# Altium PCB Pumpkin Template.PcbDoc
Units mil, origin at the board's own origin, x right, y up, seen from the top; angles counter-clockwise.
Board outline 3775 x 3550 mil, 4 copper layers (TOP Copper, Inner Layer 1, Inner Layer 2, BOT Copper), stack 61.2 mil thick; 5 components, 127 nets, 128 pads, 0 vias.
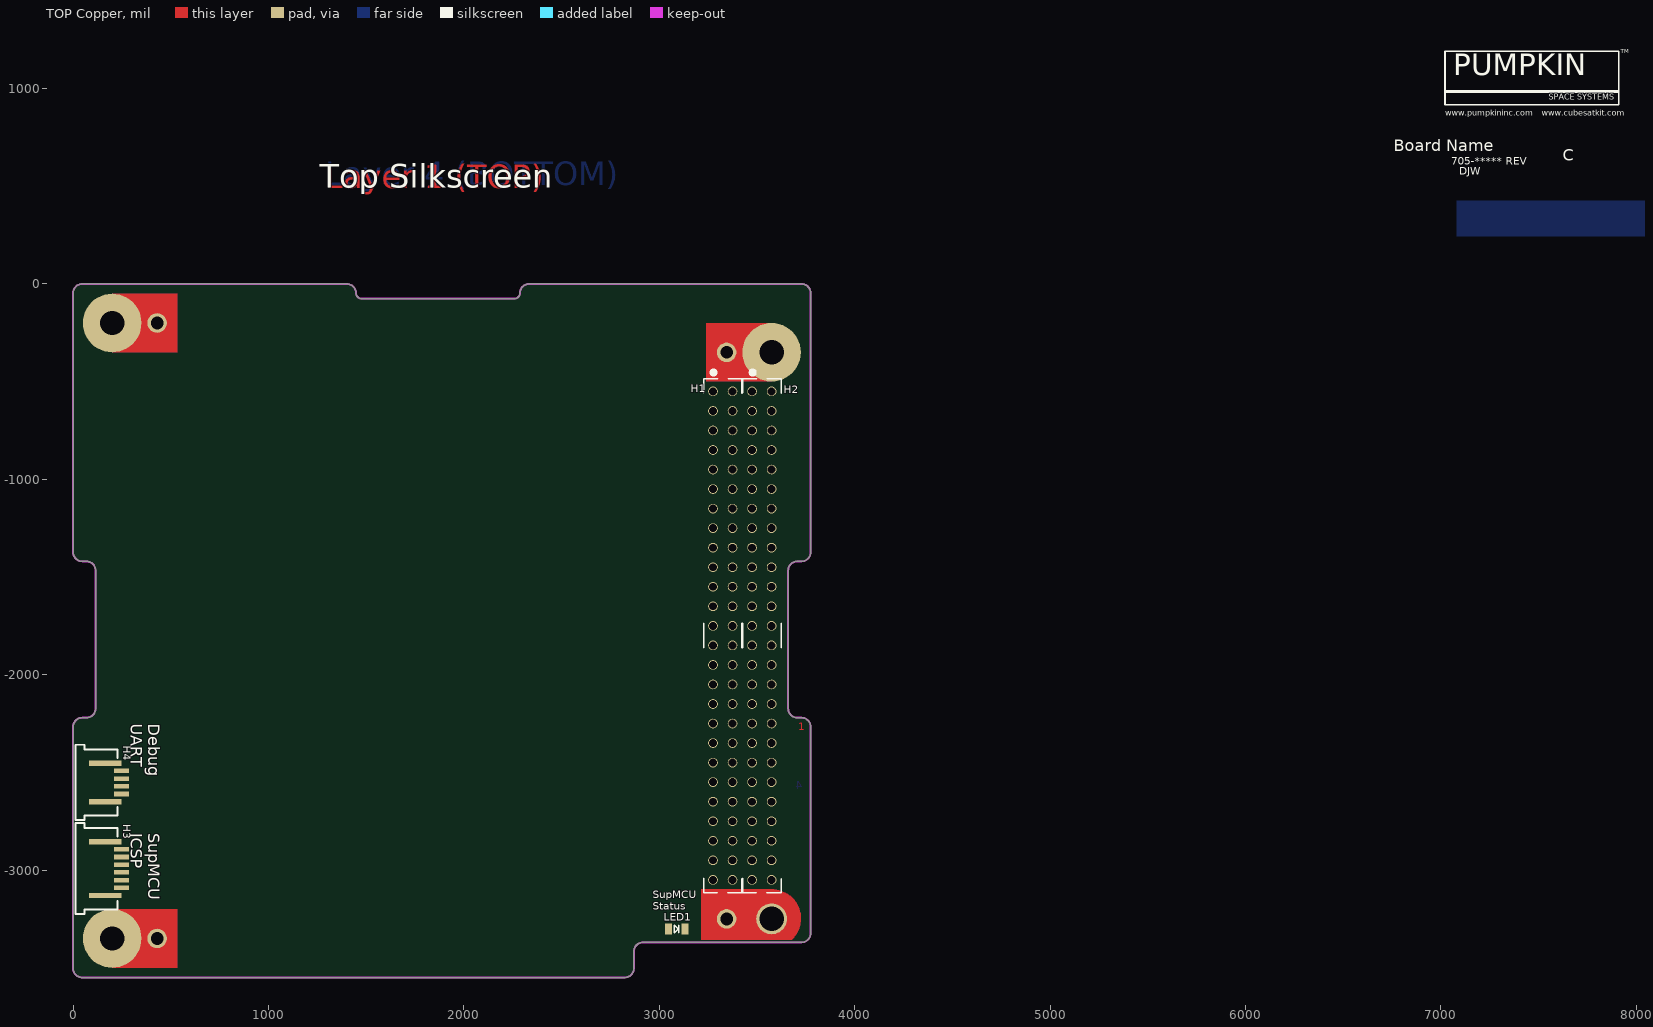
[diagram p0: TOP Copper view]
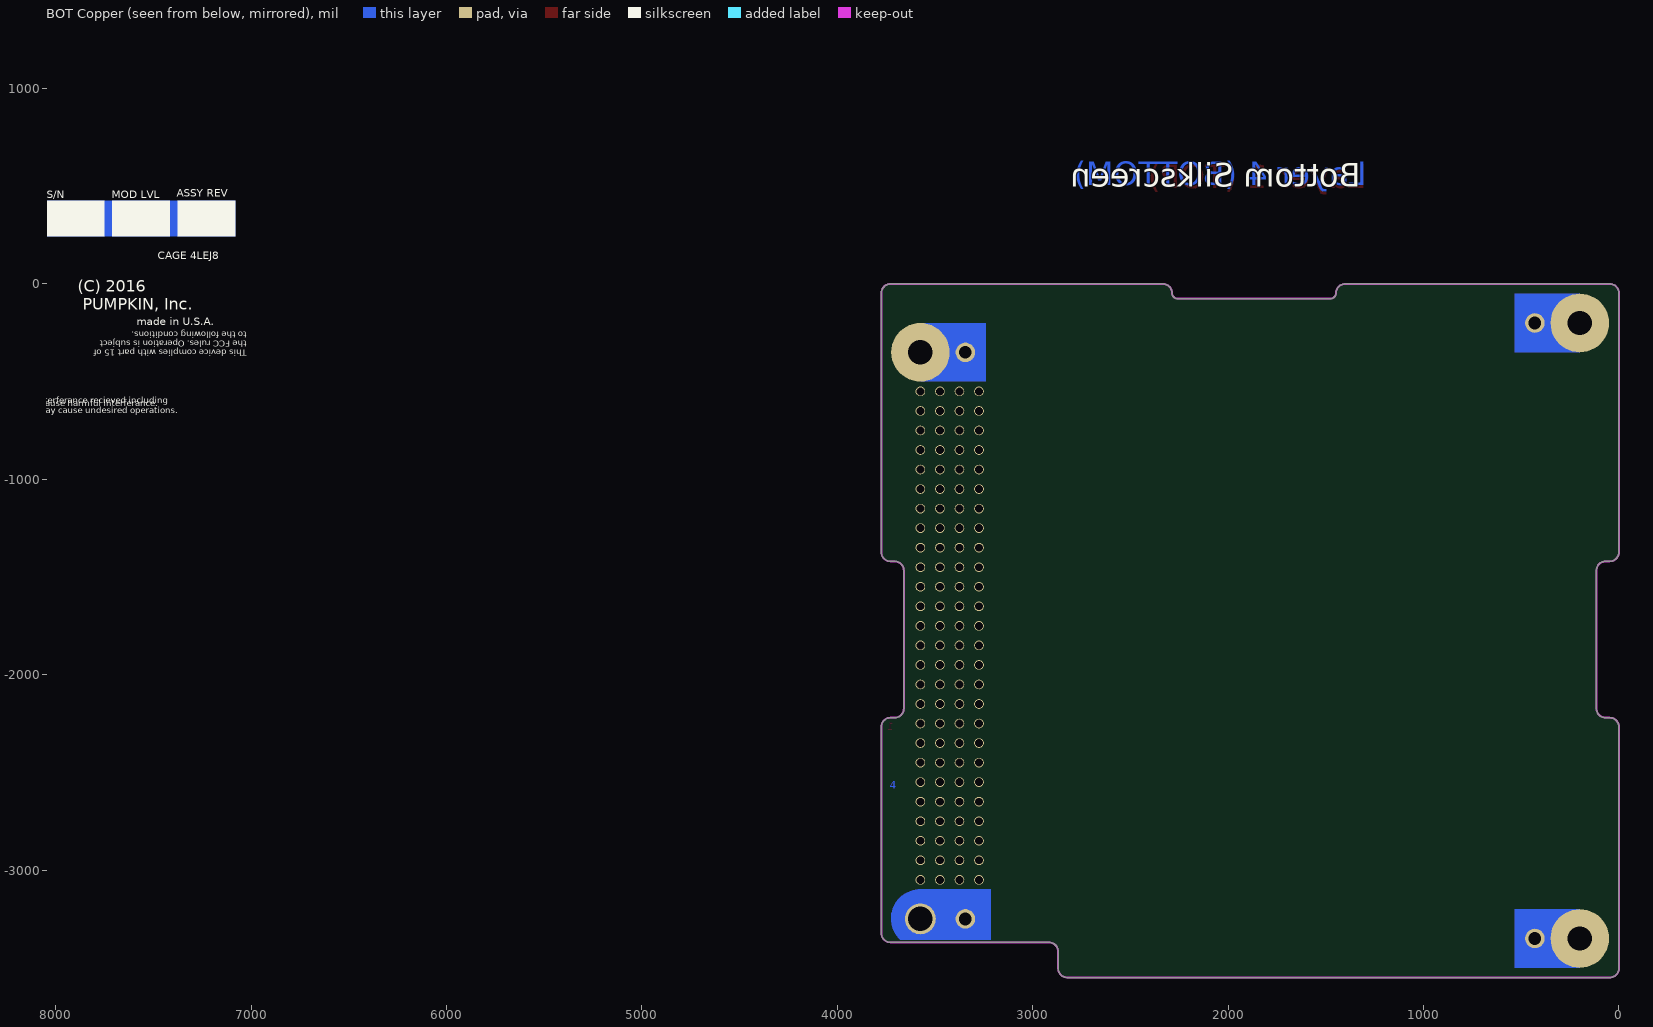
[diagram p1: BOT Copper view, seen from below]
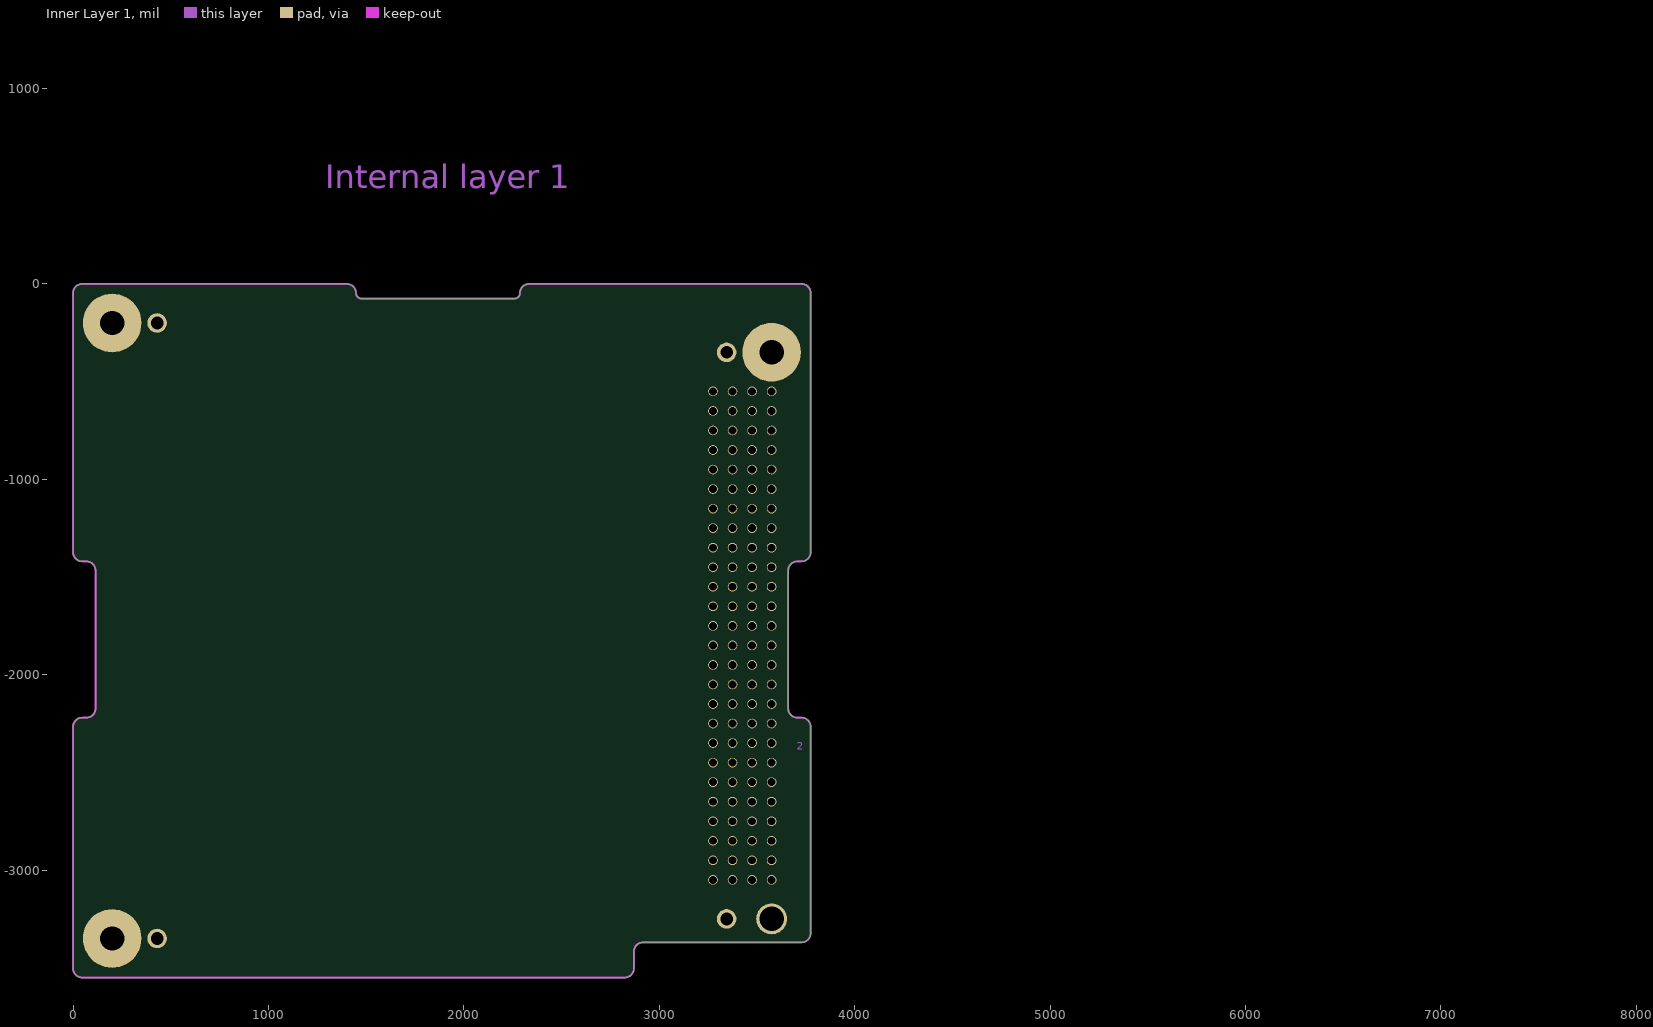
[diagram p2: Inner Layer 1]
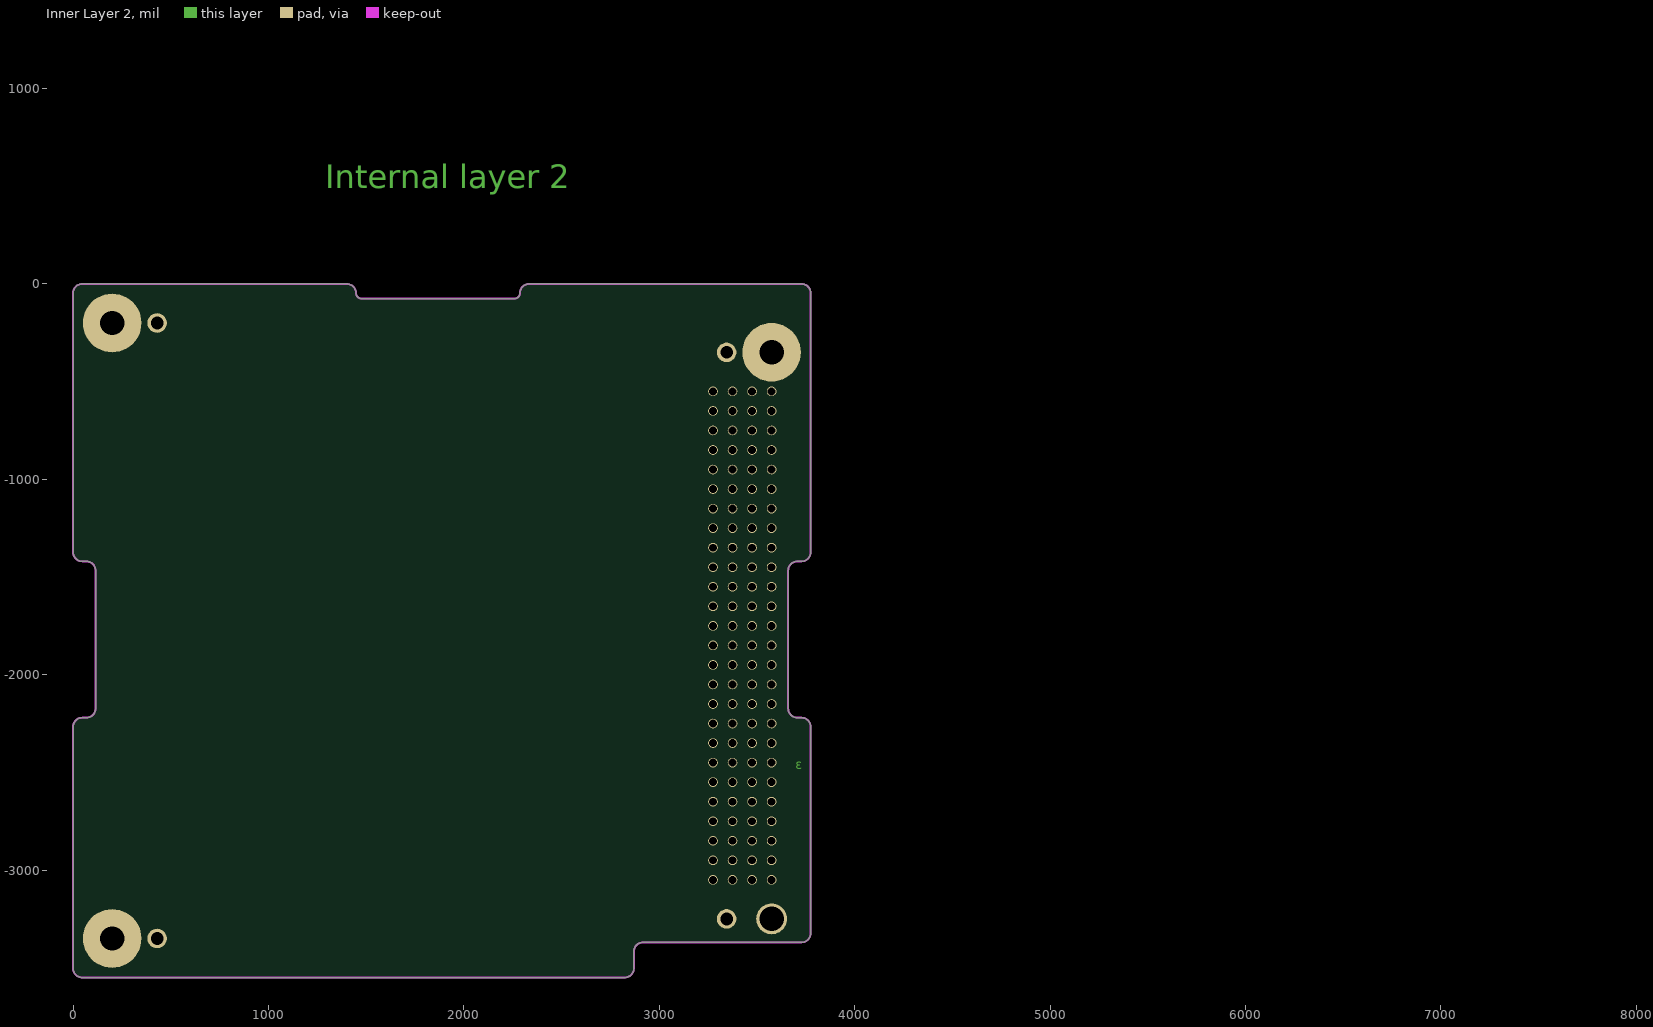
[diagram p3: Inner Layer 2]

## Layer stack, top to bottom
Top Solder: solder mask 0.4, Solder Resist, Dk 3.5
TOP Copper: signal copper 1.4
Dielectric 1: core 8, FR-4, Dk 4.8
Inner Layer 1: signal copper 1.417
Dielectric 3: prepreg 37.566, Dk 4.2
Inner Layer 2: signal copper 1.417
Dielectric 2: core 10, Dk 4.2
BOT Copper: signal copper 1.4
Bottom Solder: solder mask 0.4, Solder Resist, Dk 3.5

## Board outline
0,-3503 0,-2267 cw(c47,-2267) 47,-2220 68,-2220 ccw(c68,-2173) 115,-2173 115,-1467 ccw(c68,-1467) 68,-1420 47,-1420 cw(c47,-1373) 0,-1373 0,-47 cw(c47,-47) 47,0 1401,0 cw(c1401,-47) 1448,-47 ccw(c1476,-47) 1476,-75 2259,-75 ccw(c2259,-47) 2287,-47 cw(c2334,-47) 2334,0 3728,0 cw(c3728,-47) 3775,-47 3775,-1373 cw(c3728,-1373) 3728,-1420 3707,-1420 ccw(c3707,-1467) 3660,-1467 3660,-2173 ccw(c3707,-2173) 3707,-2220 3728,-2220 cw(c3728,-2267) 3775,-2267 3775,-3323 cw(c3728,-3323) 3728,-3370 2917,-3370 ccw(c2917,-3417) 2870,-3417 2870,-3503 cw(c2823,-3503) 2823,-3550 47,-3550 cw(c47,-3503)

## Design rules (kind name [scope] priority, off if disabled: settings)
Clearance Clearance_1 [HasFootprint('Spark_Gap') vs inPolygon] p1: gap=8
Clearance Clearance_3 [HasFootprint('Spark_Gap')] p2: gap=6
Clearance Clearance_2 [InNet('BAT_POS')   and not      HasFootprint('Spark_Gap')] p3: gap=8
Clearance Polygon_Clearence [All vs OnLayer('Keep-Out Layer')] p4: gap=10
Clearance [All] p5: gap=8
ComponentClearance [All] p1: gap=10 collisioncheckmode=3 verticalgap=1.97 showdistances=FALSE
HoleSize [All] p1: absolutevalues=TRUE maxlimit=314.96 minlimit=1 maxpercent=80.000 minpercent=20.000
MinimumSolderMaskSliver [All] p1: minsoldermaskwidth=6
PolygonConnect PolygonConnect_1 [(InPadClass('Power'))or isVia   or HasFootprint('Spark_Gap')] p1: connectstyle=Direct reliefconductorwidth=10 reliefentries=4 polygonreliefangle="90 Angle" airgapwidth=10
PolygonConnect [All] p2: connectstyle=Relief reliefconductorwidth=10 reliefentries=4 polygonreliefangle="90 Angle" airgapwidth=7.09
RoutingVias [All] p1: holewidth=7.87 width=19.68 viastyle="Through Hole" minholewidth=5 minwidth=15.75 maxholewidth=236.22 maxwidth=314.96
SilkToSilkClearance [All] p1: silktosilkclearance=0
SilkToSolderMaskClearance [IsPad] p1: minsilkscreentomaskgap=0 clearancetoexposedcopper=TRUE
SolderMaskExpansion [All] p1: expansion=0
Width [All] p1: maxlimit=100 minlimit=8 preferedwidth=10 minimp=50.000000 maximp=50.000000 favimp=50.000000
25 further rules are at their usual default settings.

## Classes and differential pairs
component class U_Battery_Module_SupMCU: c102 D9 R61
component class "U_Flight Switches": Q1 Q4

## Components (designator, comment, footprint, x,y, rotation, side; value= is the part's Value field where it differs from the comment)
H1 "CubesatBus-H1 no labels" "ESQ-126-37-G-D - bottom" 3325,-1800 r270 top
H2 "CubesatBus-H2 no labels" "ESQ-126-37-G-D - bottom" 3525,-1800 r270 top
H3 "SFW6R-2STE1LF" SFW6R-2STE1LF 247.61,-2992.32 r270 top (schematic designator H6)
H4 "SFW4R-2STE1LF" SFW4R-2STE1LF 247.61,-2551.38 r270 top (schematic designator H5)
LED1 "LED-O-0805" "0805 LED-ORANGE" 3088.83,-3301.97 r180 top

## Footprints (in the part's own frame and the unit in brackets; to place one, negate y for a bottom-side part, rotate by r counter-clockwise, add the part's x,y. Pads: shape width x height; smd on the part's side, far side on the other; paste and mask are expansions set on the pad)
"0805 LED-ORANGE" [mm] "Chip LED, 2-Leads, Body 2.05x1.25mm, IPC Medium Density"
  rect 0.91x1.41 smd: 1(-1.07,0) 2(1.07,0)
  silkscreen extent -0.3,-0.51 0.3,0.5, body extent -1.1,-0.7 1.1,0.7, height 0.8
"ESQ-126-37-G-D - bottom" [mm] "ESQ-126-37-G-D Samtech 52-pin connector"
  round 1.25 hole 1.02: 1(-31.75,-1.27) 2(-31.75,1.27) 3(-29.21,-1.27) 4(-29.21,1.27) 5(-26.67,-1.27) 6(-26.67,1.27) 7(-24.13,-1.27) 8(-24.13,1.27) 9(-21.59,-1.27) 10(-21.59,1.27) 11(-19.05,-1.27) 12(-19.05,1.27) 13(-16.51,-1.27) 14(-16.51,1.27) 15(-13.97,-1.27) 16(-13.97,1.27) 17(-11.43,-1.27) 18(-11.43,1.27) 19(-8.89,-1.27) 20(-8.89,1.27) 21(-6.35,-1.27) 22(-6.35,1.27) 23(-3.81,-1.27) 24(-3.81,1.27) 25(-1.27,-1.27) 26(-1.27,1.27) 27(1.27,-1.27) 28(1.27,1.27) 29(3.81,-1.27) 30(3.81,1.27) 31(6.35,-1.27) 32(6.35,1.27) 33(8.89,-1.27) 34(8.89,1.27) 35(11.43,-1.27) 36(11.43,1.27) 37(13.97,-1.27) 38(13.97,1.27) 39(16.51,-1.27) 40(16.51,1.27) 41(19.05,-1.27) 42(19.05,1.27) 43(21.59,-1.27) 44(21.59,1.27) 45(24.13,-1.27) 46(24.13,1.27) 47(26.67,-1.27) 48(26.67,1.27) 49(29.21,-1.27) 50(29.21,1.27) 51(31.75,-1.27) 52(31.75,1.27)
  silkscreen extent -34.45,-2.5 33.4,2.5, body extent -33.27,-2.49 33.27,2.46, height 2.22
SFW4R-2STE1LF [mm]
  rect 0.6x2 smd mask+0.038: 1(-1.5,0) 2(-0.5,0) 3(0.5,0) 4(1.5,0)
  rect 0.7x4.2 smd mask+0.038: F(-2.5,-2.1) F(2.5,-2.1)
  silkscreen extent -4.9,-6 4.9,-0.5, body extent -4.9,-5.9 4.9,0.6, height 2.7
SFW6R-2STE1LF [mm]
  rect 0.6x2 smd mask+0.038: 1(-2.5,0) 2(-1.5,0) 3(-0.5,0) 4(0.5,0) 5(1.5,0) 6(2.5,0)
  rect 0.7x4.2 smd mask+0.038: F(-3.5,-2.1) F(3.5,-2.1)
  silkscreen extent -5.9,-6 5.9,-0.5, body extent -5.9,-5.9 5.9,0.6, height 2.7

## Part data
H1 H2: "PC/104 52-pin Header"
H3: "Flex Connector 6 pin, top side"
H4: "Flex Connector 4 pin, top side"
LED1: library part "LED ORANGE 0805", "Orange 0805 LED"

## Free pads (board coordinates)
  round 300 hole 125: ""(200,-3350) ""(200,-200) ""(3575,-350)
  round 100 hole 65: ""(430,-3350) ""(430,-200) ""(3345,-350) ""(3345,-3250)
  round 157.48 hole 125: ""(3575,-3250)

## Nets (pads, with @x,y where several pads share a name; then routed paths per layer and width w, separated by ;. In a path a pad name is that pad's centre, name@x,y a point inside that pad or via, vN(x,y) a via of type N, cw(c..) or ccw(c..) an arc to the next point about the centre after c; other vN are vias at no path point)
-MCLR: 
-MRST: 
-RESET: 
-RST: 
A\L\E\R\T\: 
BAT: 
BAT_POS: 
CELL_OV: 
CHG: 
CLK_OUT: 
D\I\S\P\: 
DBG_RXD: 
DBG_TXD: 
DSG: 
EN_I2C: 
GND: 
GPOD: 
HTR_PWR: 
LED1: 
LED2: 
LED3: 
LED4: 
LED5: 
MCU_LED: 
N_RESET: 
NEG_TERM: 
NetC1_2: 
NetC3_1: 
NetC3_2: 
NetC4_1: 
NetC5_1: 
NetC8_2: 
NetC26_2: 
NetC27_2: 
NetC28_2: 
NetC31_2: 
NetC101_2: 
NetD1_2: 
NetD6_1: 
NetD7_1: 
NetD9_1: 
NetH1_1: 
NetH1_2: 
NetH3_1: 
NetH4_1: 
NetH7_4: 
NetLED7_1: 
NetQ1_1: 
NetQ1_3: 
NetQ2_1: 
NetQ2_2: 
NetQ3_1: 
NetQ3_2: 
NetQ4_G: 
NetQ5_D: 
NetQ5_G: 
NetQ6_G: 
NetQ7_G: 
NetQ8_1: 
NetQ9_1: 
NetQ11_3: 
NetQ12_1: 
NetQ12_2: 
NetQ13_3: 
NetQ14_1: 
NetQ14_2: 
NetQ14_3: 
NetQ14_6: 
NetR13_1: 
NetR14_1: 
NetR17_1: 
NetR22_2: 
NetR37_2: 
NetR59_2: 
NetR60_2: 
NetR75_2: 
NetR76_2: 
NetR77_1: 
NetR80_1: 
NetR81_1: 
NetR95_2: 
NetTP2_1: 
NetU5_6: 
NetU7_50: 
OFF_VCC: 
ON_LED: 
P\F\I\N\: 
P\R\E\S\: 
PACK: 
PGEC1: 
PGED1: 
PMS: 
POS_TERM: 
PULLUP: 
RBI: 
REG2V5: 
REG3V3: 
SAFE: 
SCL_LOC: 
SCL_SYS: 
SDA_LOC: 
SDA_SYS: 
SMB_C: 
SMB_D: 
SMBC: 
SMBD: 
SRN: 
SRP: 
"TEMP 1": 
"TEMP 2": 
"TEMP 3": 
"TEMP 4": 
THERMAL: 
TOUT: 
TS1: 
TS2: 
U2_OUT: 
VC1: 
VC2: 
VC3: 
VC4: 
VC5: 
VCAP: 
VCC: 
VCC_MCU: 
VCELL+: 
ZVCHG: 
pads on no net: H1.1 H1.2 H1.3 H1.4 H1.5 H1.6 H1.7 H1.8 H1.9 H1.10 H1.11 H1.12 H1.13 H1.14 H1.15 H1.16 H1.17 H1.18 H1.19 H1.20 H1.21 H1.22 H1.23 H1.24 H1.25 H1.26 H1.27 H1.28 H1.29 H1.30 H1.31 H1.32 H1.33 H1.34 H1.35 H1.36 H1.37 H1.38 H1.39 H1.40 H1.41 H1.42 H1.43 H1.44 H1.45 H1.46 H1.47 H1.48 H1.49 H1.50 H1.51 H1.52 H2.1 H2.2 H2.3 H2.4 H2.5 H2.6 H2.7 H2.8 H2.9 H2.10 H2.11 H2.12 H2.13 H2.14 H2.15 H2.16 H2.17 H2.18 H2.19 H2.20 H2.21 H2.22 H2.23 H2.24 H2.25 H2.26 H2.27 H2.28 H2.29 H2.30 H2.31 H2.32 H2.33 H2.34 H2.35 H2.36 H2.37 H2.38 H2.39 H2.40 H2.41 H2.42 H2.43 H2.44 H2.45 H2.46 H2.47 H2.48 H2.49 H2.50 H2.51 H2.52 H3.1 H3.2 H3.3 H3.4 H3.5 H3.6 H3.F H4.1 H4.2 H4.3 H4.4 H4.F LED1.1 LED1.2

## Keep-outs
Keep-Out Layer:
  the board outline again, w10
  text "****A" at 497.02,492.54 h120

## Other copper
TOP Copper:
  region: 3575,-200 3240,-200 3240,-500 3575,-500
  rectangle: 200,-350 535,-50
  rectangle: 200,-3500 535,-3200
  pour cut-out: 3660,-2173 3660,-2610.35 3775,-2610.35 3775,-2173
  region: 3215,-3356 3215,-3098 3575,-3098 cw(c3575,-3248) 3679.2,-3355.9 3679,-3356
  text "Layer 1 (TOP)" at 1291.02,489.54 h120
  text "1" at 3710.84,-2283.31 h40
Inner Layer 1:
  pour cut-out: 3660,-2173 3660,-2610.35 3775,-2610.35 3775,-2173
  text "Internal layer 1" at 1291.02,489.54 h120
  text "2" at 3704.17,-2383.31 h40
Inner Layer 2:
  pour cut-out: 3660,-2173 3660,-2610.35 3775,-2610.35 3775,-2173
  text "Internal layer 2" at 1291.02,489.54 h120
  text "3" at 3730.83,-2483.31 h40
BOT Copper:
  region: 8046.11,427.49 7081.54,427.49 7081.54,243.43 8046.11,243.43
  region: 3575,-200 3240,-200 3240,-500 3575,-500
  rectangle: 200,-350 535,-50
  rectangle: 200,-3500 535,-3200
  pour cut-out: 3660,-2173 3660,-2610.35 3775,-2610.35 3775,-2173
  region: 3215,-3356 3215,-3098 3575,-3098 cw(c3575,-3248) 3679.2,-3355.9 3679,-3356
  text "Layer 4 (BOTTOM)" at 1291.02,505.54 h120
  text "4" at 3730.83,-2583.31 h40

## Silkscreen, mask and mechanical layers (free items; w line width, h text height)
Top Overlay:
  lines w8: 7021.49,980.61 7911.49,980.61 ; 7021.49,988.61 7911.49,988.61 ; 7021.49,916.61 7911.49,916.61 7911.49,1191.61 7021.49,1191.61 7021.49,916.61
  text "TM" at 7919.87,1172.72 h35
  text "PUMPKIN" at 7064.49,1029.61 h190
  text "SPACE SYSTEMS" at 7551.49,932.61 h50
  text "www.pumpkininc.com" at 7022.49,859.61 h30
  text "www.cubesatkit.com" at 7516.49,859.61 h30
  text "Board Name" at 6760.36,680.13 h60
  text "C" at 7625,630 h60
  text "705-***** REV" at 7054.13,609.37 h39.37
  text "DJW" at 7094.66,559.97 h39.37
  text "Top Silkscreen" at 1261.56,491.64 h120
  text "Debug / UART" at 295.28,-2251.47 h60 r270
  text "SupMCU / ICSP" at 295.28,-2812.38 h60 r270
  text "SupMCU / Status" at 2966.79,-3203.54 h39.37
Bottom Overlay:
  region: 7376.82,427.49 7081.54,427.49 7081.54,243.43 7376.82,243.43
  region: 7711.47,427.49 7416.19,427.49 7416.19,243.43 7711.47,243.43
  region: 8046.11,427.49 7750.84,427.49 7750.84,243.43 8046.11,243.43
  text "Bottom Silkscreen" at 1322.02,497.54 h120
  text "ASSY REV" at 7380.05,445.85 h39.37
  text "MOD LVL" at 7713.43,437.98 h39.37
  text "S/N" at 8046.11,437.98 h39.37
  text "CAGE 4LEJ8" at 7478,125 h39.37
  text "(C) 2016 /  PUMPKIN, Inc." at 7887,-131 h60
  text "made in U.S.A." at 7584.59,-212.01 h39.37
  text "This device complies with part 15 of / the FCC rules. Operation is subject / to the following conditions." at 7023.33,-243.53 h31.5 r180
  text "(2) It must accept any interferance recieved including" at 8597.22,-611.4 h31.5
  text "(1) This device may not cause harmful interferance." at 8605.09,-626.36 h31.5
  text "interferance that may cause undesired operations." at 8477.14,-661.8 h31.5
Top Paste:
  text "Top Solder Paste" at 1300.02,492.54 h120
Bottom Paste:
  text "Bottom Solder Paste" at 1277.02,490.54 h120
Top Solder:
  text "Top Soldermask" at 1278.02,279.54 h120
Bottom Solder:
  text "Bottom Soldermask" at 1272.02,281.54 h120
Mechanical 2:
  text "Mechanical Drawing" at 1322.02,497.54 h120
  text "1.  ALL DIMENSIONS IN INCHES / 2.  SCALE IS 1:1 / 4.  SMOBC BOTH SIDES. COLOR: BLUE / 5.  SOLDERMASK IS LPI, SEMI-GLOSS FINISH / 6.  SILKSCREEN LEGEND WHITE / 7.  SILKSCREEN TOP AND BOTTOM / 8.  FINAL BOARD THICKNESS = 0.062\" / 9.  FINAL COPPER THICKNESS = 2oz / 10. 4 CIRCUIT LAYERS, STACKUP //8mil//39mil//8mil// / 11. MINIMUM SPACING 0.007\" / 12. MINIMUM SMD PITCH IS 0.020\" / 13. SURFACEMOUNT  COMPONENTS TOP AND BOTTOM / 14. DO NOT ADD TOOLING HOLES / 16. NUMBER OF SMD PADS: 542 / 17. NUMBER OF HOLES: 292 / 18. SMALLEST HOLE IS 0.3mm" at 4035.72,-1120.03 h60
Drill Drawing:
  lines w15: 3992.04,-3474.34 9626.51,-3474.34 ; 3992.04,-3024.34 9626.51,-3024.34 ; 4542.91,-3624.34 4542.91,-2874.34 ; 5122.76,-3624.34 5122.76,-2874.34 ; 6262.43,-3624.34 6262.43,-2874.34 ; 6768.3,-3624.34 6768.3,-2874.34 ; 7502.1,-3624.34 7502.1,-2874.34 ; 8367.86,-3624.34 8367.86,-2874.34 ; 3992.04,-3624.34 9626.51,-3624.34 9626.51,-2874.34 3992.04,-2874.34 3992.04,-3624.34
  text "Drill Drawing" at 1277.02,274.54 h120
  text "Symbol" at 4082.04,-2979.34 h72
  text "Count" at 4587.91,-2979.34 h72
  text "Hole Size" at 5167.76,-2979.34 h72
  text "Plated" at 6307.43,-2979.34 h72
  text "Hole Type" at 6813.3,-2979.34 h72
  text "Hole Length" at 7547.1,-2979.34 h72
  text "Rout Path Length" at 8412.86,-2979.34 h72
  text "104" at 4587.91,-3129.34 h60
  text "40.16mil (1.020mm)" at 5167.76,-3129.34 h60
  text "PTH" at 6307.43,-3129.34 h60
  text "Round" at 6813.3,-3129.34 h60
  text "-" at 7547.1,-3129.34 h60
  text "-" at 8412.86,-3129.34 h60
  text "P" at 4052.95,-3139.33 h66.67
  text "4" at 4587.91,-3279.34 h60
  text "65.00mil (1.651mm)" at 5167.76,-3279.34 h60
  text "PTH" at 6307.43,-3279.34 h60
  text "Round" at 6813.3,-3279.34 h60
  text "-" at 7547.1,-3279.34 h60
  text "-" at 8412.86,-3279.34 h60
  text "S" at 4052.95,-3289.33 h66.67
  text "4" at 4587.91,-3429.34 h60
  text "125.00mil (3.175mm)" at 5167.76,-3429.34 h60
  text "PTH" at 6307.43,-3429.34 h60
  text "Round" at 6813.3,-3429.34 h60
  text "-" at 7547.1,-3429.34 h60
  text "-" at 8412.86,-3429.34 h60
  text "T" at 4052.95,-3439.33 h66.67
  text "112 Total" at 4587.91,-3579.34 h60

## Dimensions
47,0 to 47,-3550 on Mechanical 2
0,-3503 to 3775,-3323 on Mechanical 2